# Altium PCB UBS-TTL Converter.PcbDoc
Units mm, origin at the board's own origin, x right, y up, seen from the top; angles counter-clockwise.
Board outline 45 x 15 mm, 2 copper layers (Top Layer, Bottom Layer); 23 components, 12 nets, 80 pads, 31 vias.
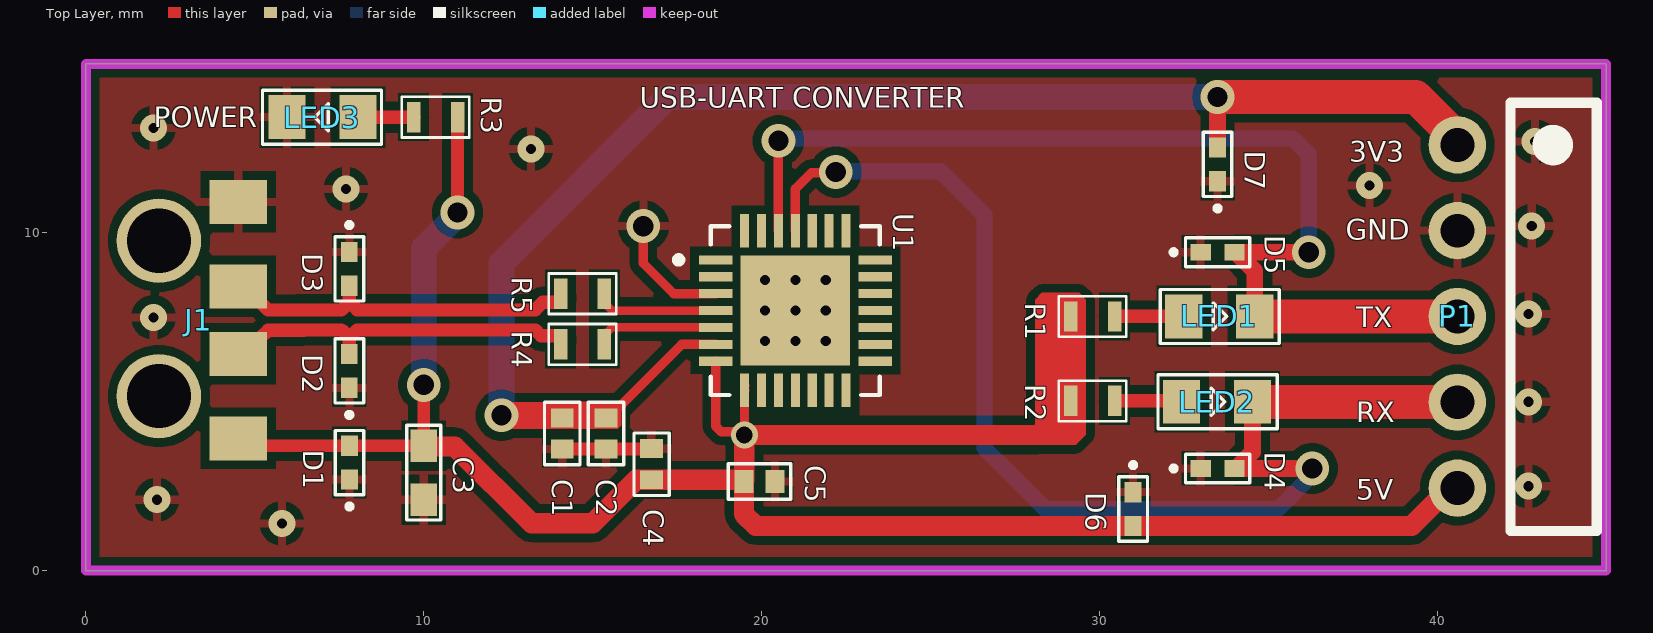
[diagram p0: Top Layer view]
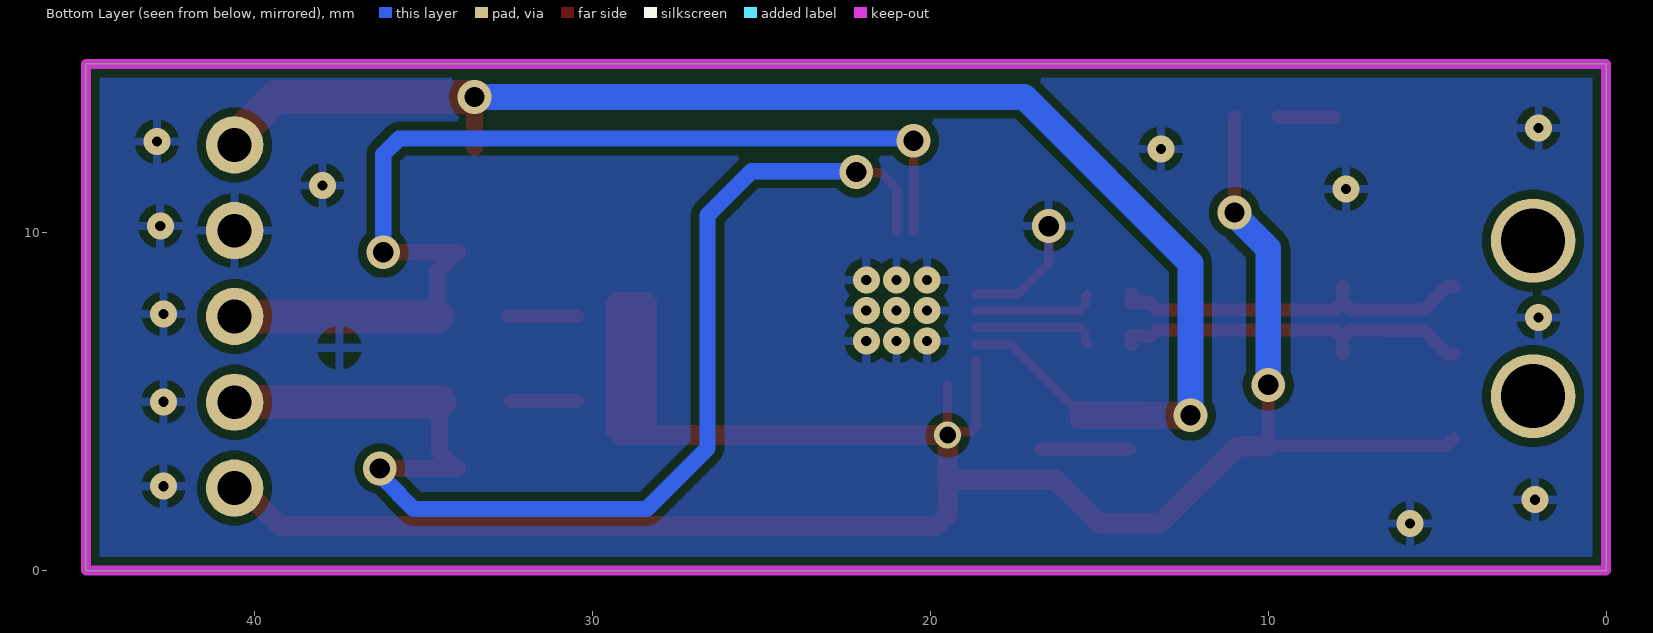
[diagram p1: Bottom Layer view, seen from below]
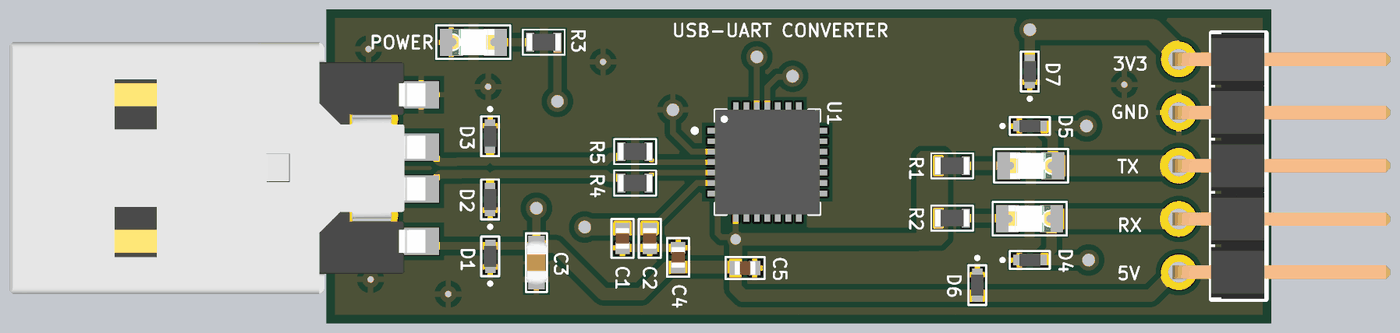
[diagram p2: 3D render of the assembled board from above, using the file's embedded part models]

## Layer stack, top to bottom
Top Solder: solder mask 0.0102, Solder Resist, Dk 3.5
Top Layer: signal copper 0.0356
Dielectric 1: dielectric 0.32, FR-4, Dk 4.8
Bottom Layer: signal copper 0.0356
Bottom Solder: solder mask 0.0102, Solder Resist, Dk 3.5

## Board outline
0,0.001 0,15.001 45,15.001 45,0.001

## Design rules (kind name [scope] priority, off if disabled: settings)
Clearance [All] p1: gap=0.254 ignorepadtopadclearanceinfootprint=FALSE except(0: Arc-SMDPad Arc-Text Arc-Hole Track-SMDPad Track-Text Track-Hole SMDPad-SMDPad SMDPad-Text SMDPad-Hole THPad-Text THPad-Hole Via-Text Via-Hole Fill-Text Fill-Hole Poly-Text Poly-Hole Region-Text Region-Hole Text-Text Text-Hole; 0.127: Arc-Arc Arc-Track Track-Track)
DiffPairsRouting DiffPairsRouting_1 [InDifferentialPair('IC')] p1: maxlimit=0.117 minlimit=0.117 mostfreqgap=0.117 toplayer_minwidth=0.254 toplayer_maxwidth=0.254 toplayer_prefwidth=0.254 bottomlayer_minwidth=0.254 bottomlayer_maxwidth=0.254 bottomlayer_prefwidth=0.254 impedanceprofiledriven=TRUE impedanceprofileid={51EF5323-5865-444E-A15E-9A349A4A8014} impedanceprofilevalue=90.000000 maxuncoupledlength=12.7
DiffPairsRouting [InDifferentialPair('DATA')] p2: maxlimit=0.203 minlimit=0.203 mostfreqgap=0.203 toplayer_minwidth=0.39 toplayer_maxwidth=0.39 toplayer_prefwidth=0.39 bottomlayer_minwidth=0.39 bottomlayer_maxwidth=0.39 bottomlayer_prefwidth=0.39 impedanceprofiledriven=TRUE impedanceprofileid={1906FB47-23F9-44E9-BDE8-46F52C660707} impedanceprofilevalue=90.000000 maxuncoupledlength=12.7
PolygonConnect [All] p1: connectstyle=Relief reliefconductorwidth=0.254 reliefentries=4 polygonreliefangle="90 Angle" airgapwidth=0.254
RoutingVias [All] p1: holewidth=0.711 width=1.27 viastyle="Through Hole" minholewidth=0.711 minwidth=1.27 maxholewidth=0.711 maxwidth=1.27
SolderMaskExpansion [All] p1: expansion=0.102 istentingtop=FALSE
Width [All] p1: maxlimit=17.78 minlimit=0.076 preferedwidth=0.762 minimp=50.000000 maximp=50.000000 favimp=50.000000
29 further rules are at their usual default settings.

## Classes and differential pairs
differential pair IC: +IC_P -IC_N
differential pair DATA: +DATA_P -DATA_N

## Components (designator, comment, footprint, x,y, rotation, side; value= is the part's Value field where it differs from the comment)
C1 "LMK105BBJ475MVLF" "CAP 0402" 14.1,4.06 r90 top value=4.7uF
C2 "C0402C104K4RACTU" "CAP 0402" 15.4,4.06 r90 top value=100nF
C3 "CL10A106MP8NNNC" "CAP 0603" 10,2.9 r90 top value=10uF
C4 "C0402X5R100-105MNE" "CAP 0402" 16.748,3.151 r270 top value=1uF
C5 "C0402C104K4RACTU" "CAP 0402" 19.939,2.645 r180 top value=100nF
D1 "TPD1E10B06DPYR" "TVS DIODE" 7.8,3.2 r90 top
D2 "TPD1E10B06DPYR" "TVS DIODE" 7.796,5.913 r90 top
D3 "TPD1E10B06DPYR" "TVS DIODE" 7.796,8.932 r270 top
D4 "TPD1E10B06DPYR" "TVS DIODE" 33.5,3.026 r0 top
D5 "TPD1E10B06DPYR" "TVS DIODE" 33.5,9.426 r0 top
D6 "TPD1E10B06DPYR" "TVS DIODE" 31,1.826 r270 top
D7 "TPD1E10B06DPYR" "TVS DIODE" 33.5,12.026 r90 top
J1 "629004113921" "USB TYPE-A" 3.334,7.417 r270 top
LED1 "150080VS75000" "LED 0805" 33.55,7.526 r0 top
LED2 "150080VS75000" "LED 0805" 33.487,5 r0 top
LED3 "150080VS75000" "LED 0805" 7,13.426 r180 top
P1 "61300511021" CONNECTOR 40.6,7.526 r90 top
R1 "CRGH0603F330R" "RES 0603" 29.8,7.526 r0 top value=330R
R2 "CRGH0603F330R" "RES 0603" 29.8,5.026 r0 top value=330R
R3 "CRGH0603F330R" "RES 0603" 10.35,13.426 r180 top value=330R
R4 "RC0603FR-7W100RL" "RES 0603" 14.7,6.7 r0 top value=100R
R5 "RC0603FR-7W100RL" "RES 0603" 14.7,8.2 r0 top value=100R
U1 "CP2102-GM" QFN-28 21,7.7 r0 top

## Footprints (in the part's own frame and the unit in brackets; to place one, negate y for a bottom-side part, rotate by r counter-clockwise, add the part's x,y. Pads: shape width x height; smd on the part's side, far side on the other; paste and mask are expansions set on the pad)
"CAP 0402" [mm]
  rect 0.56x0.68 smd: 1(-0.46,0) 2(0.46,0)
  silkscreen extent -0.92,-0.53 0.92,0.53, body extent -0.5,-0.33 0.5,0.32, height 0.5
"CAP 0603" [mil]
  rect 38x31 smd mask+1.97: 1(-31.5,0) 2(31.5,0)
  silkscreen extent -55,-20 55,20, body extent -41,-21 41,20, height 31
CONNECTOR [mm]
  round 1.7 hole 1 mask+0.05: 1(5.08,0) 2(2.54,0) 3(0,0) 4(-2.54,0) 5(-5.08,0)
  silkscreen extent -6.35,-4.13 6.32,-1.58, body extent -6.35,-10.07 6.35,0.29, height 2.57
"LED 0805" [mm]
  rect 1.1x1.3 smd mask+0.05: 1(-1.05,0) 2(1.05,0)
  silkscreen extent -1.75,-0.8 1.78,0.8, body extent -1,-0.63 1,0.63, height 0.7
QFN-28 [mm]
  rect 0.99x0.27 smd: 1(-2.36,1.5) 2(-2.36,1) 3(-2.36,0.5) 4(-2.36,0) 5(-2.36,-0.5) 6(-2.36,-1) 7(-2.36,-1.5) 15(2.36,-1.5) 16(2.36,-1) 17(2.36,-0.5) 18(2.36,0) 19(2.36,0.5) 20(2.36,1) 21(2.36,1.5)
  rect 0.27x0.99 smd: 8(-1.5,-2.36) 9(-1,-2.36) 10(-0.5,-2.36) 11(0,-2.36) 12(0.5,-2.36) 13(1,-2.36) 14(1.5,-2.36) 22(1.5,2.36) 23(1,2.36) 24(0.5,2.36) 25(0,2.36) 26(-0.5,2.36) 27(-1,2.36) 28(-1.5,2.36)
  rect 3.25x3.25 smd paste-0.597: 29(0,0)
  silkscreen extent -3.55,-2.5 2.5,2.5, body extent -2.5,-2.5 2.5,2.5, height 0.77
"RES 0603" [mm]
  rect 0.4x0.9 smd mask+0.05: 1(-0.65,0) 2(0.65,0)
  silkscreen extent -1,-0.6 1,0.6, body extent -0.8,-0.4 0.8,0.4, height 0.55
"TVS DIODE" [mm]
  rect 0.6x0.5 smd: 1(-0.5,0) 2(0.5,0)
  silkscreen extent -1.37,-0.43 0.95,0.43, body extent -0.5,-0.3 0.5,0.3, height 0.45
"USB TYPE-A" [mm]
  rect 1.3x1.7 smd mask+0.05: 1(3.5,1.175) 2(1,1.175) 3(-1,1.175) 4(-3.5,1.175)
  round 2.5 hole 1.9 mask+0.05: ""(-2.35,-1.175) ""(2.25,-1.175)
  body extent -6,-18.42 6,1.38, height 2.25

## Part data
C1: library part "CAP CER 4.7UF 0402", "CAP CER 4.7UF 10V X5R 0402"
C2 C5: library part "CAP CER 100NF 0402", "CAP CER 0.1UF 16V X7R 0402"
C3: library part "CAP CER 10UF 0603", "CAP CER 10UF 10V X5R 0603"
C4: library part "CAP CER 1UF 0402", "CAP CER 1UF 10V X5R 0402"
D1 D2 D3 D4 D5 D6 D7: library part "TVS DIODE SMD", "TVS DIODE 5.5VWM 14VC 2X1SON"
J1: library part "CONN USB2.0 TYPE-A", "CONN USB2.0 TYPEA 4P SMD RA"
LED1 LED2: library part "GREEN LED 0805", "LED GREEN 0805 SMD"
LED3: library part "RED LED 0805", "LED GREEN 0805 SMD"
P1: library part "CONN HEADER 5POS", "CONN HEADER R/A 5POS 2.54MM"
R1 R2 R3: library part "RES 330 OHM 0603", "RES 330 OHM 1% 1/5W 0603"
R4 R5: library part "RES 100 OHM 0603", "RES 100 OHM 1% 1/5W 0603"
U1: library part "CP2102 SMD", "IC USB-TO-UART BRIDGE 28VQFN"

## Via types
v1: diameter 0.8, hole 0.3, Top Layer to Bottom Layer, tented both sides, 21 vias
v2: diameter 1, hole 0.6, Top Layer to Bottom Layer, tented both sides, 9 vias
v3: diameter 0.8, hole 0.5, Top Layer to Bottom Layer, tented both sides, 1 vias

## Nets (pads, with @x,y where several pads share a name; then routed paths per layer and width w, separated by ;. In a path a pad name is that pad's centre, name@x,y a point inside that pad or via, vN(x,y) a via of type N, cw(c..) or ccw(c..) an arc to the next point about the centre after c; other vN are vias at no path point)
DATA_N: D2.2 J1.2 R4.1 | length 10.8
  Top Layer w0.39: J1.2 4.709,6.417 5.164,6.871 5.164,6.891 5.393,7.12 6.447,7.12 6.453,7.126 7.568,7.126 7.796,6.897 ; D2.2 7.796,6.897 ; R4.1 14.05,6.95 14.045,6.955 13.471,6.955 13.3,7.126 8.025,7.126 7.796,6.897
DATA_P: D3.2 J1.3 R5.1 | length 10.9
  Top Layer w0.39: J1.3 4.709,8.417 5.164,7.962 5.164,7.942 5.393,7.713 6.201,7.713 6.207,7.719 7.568,7.719 7.796,7.948 ; D3.2 7.796,7.948 ; R5.1 14.05,7.95 14.045,7.945 13.526,7.945 13.3,7.719 8.025,7.719 7.796,7.948
GND: C1.1 C2.1 C3.1 C4.1 C5.1 D1.1 D2.1 D3.1 D4.1 D5.1 D6.1 D7.1 J1.4 LED3.2 P1.2 U1.3 U1.29 | length 6.3
  Top Layer w0.279: v2(16.5,10.2) 16.5,9.1 17.4,8.2 U1.3
  Top Layer w0.381: C1.1 C2.1 15.406,3.606 16.742,3.606 C4.1
  other v1: 5.8,1.4 2.1,2.1 42.7,2.5 42.7,5 20.1,6.8 21,6.8 21.9,6.8 2,7.5 42.7,7.6 20.1,7.7 21,7.7 21.9,7.7 20.1,8.6 21,8.6 21.9,8.6 42.8,10.2 7.7,11.3 38,11.4 13.174,12.484 42.9,12.7 2,13.1
IC_N: R4.2 U1.5 | length 3.7
  Top Layer w0.254: R4.2 15.423,6.773 15.423,7.051 15.572,7.2 16.9,7.2 U1.5
IC_P: R5.2 U1.4 | length 3.7
  Top Layer w0.254: R5.2 15.423,8.127 15.423,7.849 15.572,7.7 17,7.7 U1.4
NetLED1_1: LED1.1 R1.2 | length 2
  Top Layer w0.4: R1.2 LED1.1
NetLED2_1: LED2.1 R2.2 | length 2
  Top Layer w0.4: R2.2 32.412,5.026 LED2.1
NetLED3_1: LED3.1 R3.2 | length 1.6
  Top Layer w0.4: LED3.1 R3.2
RXLED: D4.2 LED2.2 P1.4 U1.25 | length 36.1
  Top Layer w0.279: U1.25 21,11.3 21.479,11.779 22.179,11.779 v2(22.2,11.8)
  Top Layer w0.5: D4.2 D4.2@34.05,3.026 ; LED2.2 34.537,3.513 D4.2@34.05,3.026 ; v2(36.3,3.026) D4.2@34.05,3.026
  Top Layer w1: LED2.2 34.545,4.993 40.593,4.993 P1.4
  Bottom Layer w0.483: v2(22.2,11.8) 22.226,11.826 25.3,11.826 26.6,10.526 26.6,3.626 28.4,1.826 35.3,1.826 35.725,2.25 35.725,2.268 36.3,2.844 v2(36.3,3.026)
TXLED: D5.2 LED1.2 P1.3 U1.26 | length 31.8
  Top Layer w0.279: U1.26 v2(20.5,12.726)
  Top Layer w0.5: D5.2 D5.2@34.05,9.426 ; LED1.2 34.6,8.876 D5.2@34.05,9.426 ; v2(36.2,9.426) D5.2@34.05,9.426
  Top Layer w1: LED1.2 P1.3
  Bottom Layer w0.483: v2(20.5,12.726) 20.57,12.795 35.731,12.795 36.2,12.326 v2(36.2,9.426)
VBUS: C3.2 C4.2 C5.2 D1.2 D6.2 J1.1 P1.5 R1.1 R2.1 R3.1 U1.7 U1.8 | length 64.9
  Top Layer w0.26: U1.8@19.504,5.481 U1.8@19.508,5.485
  Top Layer w0.279: U1.7 18.64,4.278 18.804,4.114 19.39,4.114 v3(19.49,4.015) 19.495,4.02 19.495,5.335 U1.8
  Top Layer w0.381: J1.1 4.726,3.7 D1.2 ; D1.2@7.8,3.7 C3.2 v2(10,5.5) ; v2(11,10.6) R3.1
  Top Layer w0.6: C3.2 10.024,3.676 10.924,3.676 13.2,1.4 15,1.4 16.291,2.691 19.452,2.691 19.479,2.665 C5.2 ; R2.1@29.05,4.876 28.19,4.015 v3(19.49,4.015) 19.49,2.655 C5.2 ; P1.5 40.365,2.446 39.245,1.326 D6.2 19.83,1.326 19.479,1.677 C5.2
  Bottom Layer w0.762: v2(10,5.5) 10,9.536 11,10.536 v2(11,10.6)
VDD: C1.2 C2.2 D7.2 P1.1 U1.6 | length 42.9
  Top Layer w0.279: C2.2 15.46,4.52 17.64,6.7 U1.6
  Top Layer w0.5: D7.2 v2(33.5,14.026)
  Top Layer w0.8: v2(12.3,4.6) C1.2@14.02,4.6
  Top Layer w1: v2(33.5,14.026) 39.37,14.026 40.6,12.795 P1.1
  Bottom Layer w0.762: v2(12.3,4.6) 12.3,9.1 17.226,14.026 v2(33.5,14.026)
pads on no net: J1. U1.1 U1.2 U1.9 U1.10 U1.11 U1.12 U1.13 U1.14 U1.15 U1.16 U1.17 U1.18 U1.19 U1.20 U1.21 U1.22 U1.23 U1.24 U1.27 U1.28

## Polygon pours and split planes (outlines as drawn)
GND on Bottom Layer "GND_L02_P000" (solid, remove dead copper, pour order 0): 0.2,14.8 44.8,14.8 44.8,0.2 0.2,0.2
GND on Top Layer "GND_L01_P001" (solid, remove dead copper, pour order 1): 0.2,14.8 44.8,14.8 44.8,0.2 0.2,0.2

## Keep-outs
Keep-Out Layer:
  the board outline again, w0.3

## Other copper
Top Layer:
  region net VDD: 13.55,4.9 13.55,4.3 13.65,4.2 15.75,4.2 15.85,4.3 15.85,4.6 15.85,4.9 15.75,5 13.65,5
  region net VBUS: 28.1,8.026 28.3,8.226 29.4,8.226 29.6,8.026 29.6,4.026 29.3,3.726 28.1,3.725

## Silkscreen, mask and mechanical layers (free items; w line width, h text height)
Top Overlay:
  text "USB-UART CONVERTER" at 16.4,13.7 h0.6
  text "POWER" at 2,13.126 h0.6
  text "3V3" at 37.4,12.1 h0.6
  text "GND" at 37.3,9.8 h0.6
  text "TX" at 37.6,7.2 h0.6
  text "RX" at 37.6,4.4 h0.6
  text "5V" at 37.6,2.1 h0.6